# EAGLE board RH016.1 (EAGLE 7.1.0)
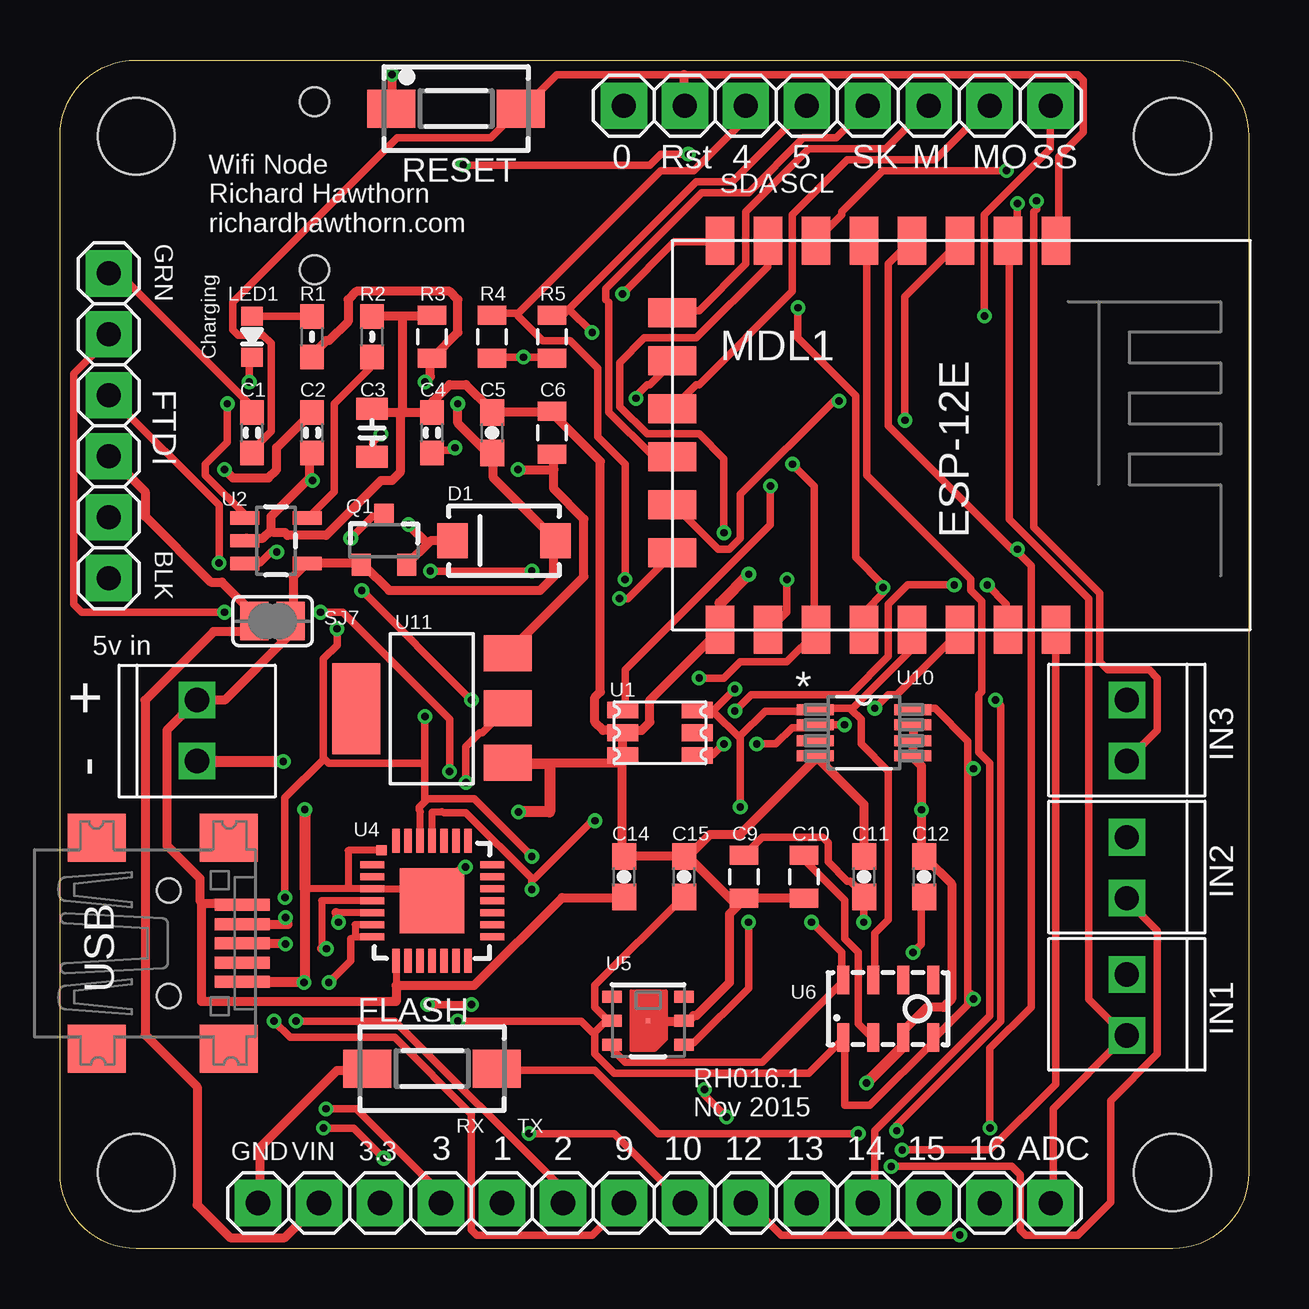
[diagram p0: board, top side]
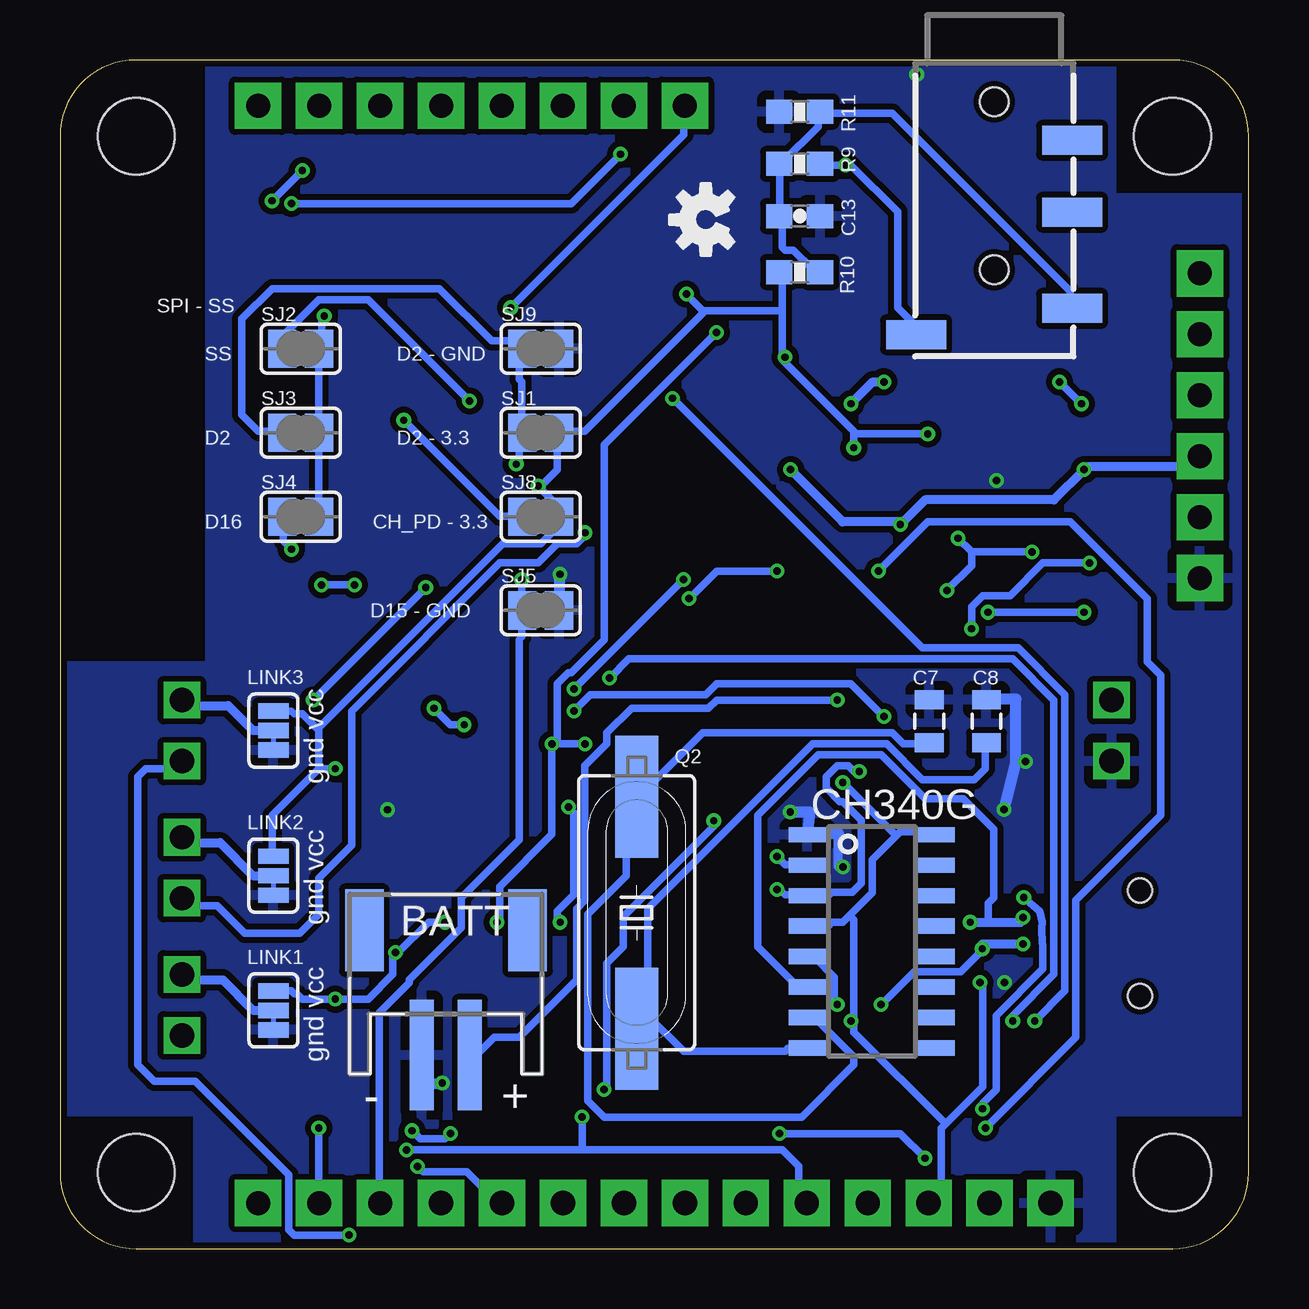
[diagram p1: board, bottom side, seen from below]

Size 49.53 x 49.53 mm. Coordinates in mm from the lower left corner, seen from the top.
Outline: 0,3.17 0,46.35 arc-90 3.17,49.53 46.35,49.53 arc-90 49.53,46.35 49.53,3.17 arc-90 46.35,0 3.17,0 arc-90 0,3.17
Copper layers (1*16): Top 0.035mm / dielectric 1.5mm / Bottom 0.035mm
Design rules "ITEADstudio_DRC *": minimum track width 12mil, minimum drill 12mil, track to track 6mil, track to pad 6mil, pad to pad 6mil, via to via 6mil, smd to smd 0mil, copper to edge 10mil, drill to drill 10mil, minimum pad ring 10mil, minimum via ring 6mil, stop-mask expansion 2mil, vias tented up to drill 100mil, thermal gap 15mil
Net classes: 1 power: width 0.381 mm, clearance 0.254 mm
Holes 3.2 mm at 3.17,3.17 46.35,3.17 3.17,46.35 46.35,46.35
tRestrict: area 43.5,24.5 to 49.5,49.5; area 44,0 to 49.5,5.5; area 0,44 to 5.5,49.5; area 0,0 to 5.5,5.5
bRestrict: area 43.5,24.5 to 49.5,49.5; area 0,0 to 5.5,5.5; area 44,0 to 49.5,5.5; area 0,44 to 5.5,49.5

## Footprints (pad centres in the part's own frame; a part is rotated, then mirrored left to right if it is on the bottom)
0603-CAP = smd 1.016 x 0.965: 1 -0.85,0; 2 0.85,0
0805-CAP = smd 0.902 x 1.3: 1 -1,0; 2 1,0
0603-CAP' = smd 1.1 x 1: 1 -0.85,0; 2 0.85,0
0805 = smd 0.8 x 1.2: 1 -0.9,0; 2 0.9,0
USB-MINIB = smd 0.5 x 2.308: D+ 0,4.064; D- -0.8,4.064; GND 1.6,4.064; ID 0.8,4.064; VBUS -1.6,4.064 | smd 2 x 2.4: GND1 -4.4,-2; GND2 -4.4,3.5; GND3 4.4,3.5; GND4 4.4,-2 | hole 1: -2.2,1; 2.2,1
JST-PH-2-SMT-RA = smd 1 x 4.6: 1 1,-3.7; 2 -1,-3.7 | smd 1.6 x 3.4: NC1 -3.4,1.5; NC2 3.4,1.5
1X06 = drill 1 pad 1.93 square: 1 -6.35,0; 2 -3.81,0; 3 -1.27,0; 4 1.27,0; 5 3.81,0; 6 6.35,0
SMA-DIODE = smd 1.27 x 1.47: A -2.15,0; C 2.15,0
DTSM-3 = smd 2 x 1.6: 1 -2.7,0; 2 2.7,0
1X02_2.54_SCREWTERM = drill 1.016 square: P1 2.54,0; P2 0,0
1X14 = drill 1 pad 1.93 square: 1 -16.51,0; 2 -13.97,0; 3 -11.43,0 | drill 1.016 pad 1.93 square: 4 -8.89,0; 5 -6.35,0; 6 -3.81,0; 7 -1.27,0; 8 1.27,0; 9 3.81,0; 10 6.35,0; 11 8.89,0; 12 11.43,0; 13 13.97,0; 14 16.51,0
1X08 = drill 1 pad 1.93 square: 1 -8.89,0; 2 -6.35,0; 3 -3.81,0; 4 -1.27,0; 5 1.27,0; 6 3.81,0; 7 6.35,0; 8 8.89,0
0603-LED = smd 0.8 x 0.9: MINUS -0.85,0; PLUS 0.85,0
PAD-JUMPER-3-2OF3_NC_BY_TRACE_YES_SILK_FULL_BOX = smd 0.635 x 1.27: 1 -0.813,0; 2 0,0; 3 0.813,0
ESP8266-ESP12E = smd 2 x 1.2: 1 0,16; 2 0,14; 3 0,12; 4 0,10; 5 0,8; 6 0,6; 7 0,4; 8 0,2; 9 16.2,2; 10 16.2,4; 11 16.2,6; 12 16.2,8; 13 16.2,10; 14 16.2,12; 15 16.2,14; 16 16.2,16 | smd 1.2 x 2: 17 11,0; 18 3,0; 19 5,0; 20 13,0; 21 7,0; 22 9,0
SOT23-3 = smd 0.8 x 0.9: 1 -0.95,-1; 2 0.95,-1; 3 0,1.1
SM49 = smd 5.08 x 1.778: 1 -4.826,0; 2 4.826,0
0603-RES = smd 1.016 x 0.965: 1 -0.85,0; 2 0.85,0
0603-RES' = smd 1.1 x 1: 1 -0.85,0; 2 0.85,0
SJ = smd 1.168 x 1.6: 1 -0.762,0; 2 0.762,0
TMB-6 = smd 1.3 x 0.7: 1 -1.55,0.95; 2 -1.55,0; 3 -1.55,-0.95; 4 1.55,-0.95; 5 1.55,0; 6 1.55,0.95
SOT23-5 = smd 0.55 x 1.2: 1 -0.95,-1.3; 2 0,-1.3; 3 0.95,-1.3; 4 0.95,1.3; 5 -0.95,1.3
MLP28 = smd 1 x 0.3: 1 -2.5,1.5; 2 -2.5,1; 3 -2.5,0.5; 4 -2.5,0; 5 -2.5,-0.5; 6 -2.5,-1; 7 -2.5,-1.5; 15 2.5,-1.5; 16 2.5,-1; 17 2.5,-0.5; 18 2.5,0; 19 2.5,0.5; 20 2.5,1; 21 2.5,1.5 | smd 0.3 x 1: 8 -1.5,-2.5; 9 -1,-2.5; 10 -0.5,-2.5; 11 0,-2.5; 12 0.5,-2.5; 13 1,-2.5; 14 1.5,-2.5; 22 1.5,2.5; 23 1,2.5; 24 0.5,2.5; 25 0,2.5; 26 -0.5,2.5; 27 -1,2.5; 28 -1.5,2.5 | smd 2.7 x 2.7: EXP 0,0 | smd 0.435 x 0.435: M -2.103,2.103
HTU21D = smd 0.2 x 0.2: 7 0,0 | smd 0.8 x 0.5: DATA 1.5,-1; GND 1.5,0; NC@1 -1.5,1; NC@6 1.5,1; SCK -1.5,-1; VDD -1.5,0
LGA8 = smd 1.2 x 0.5: 1 -1.2,1.875; 2 -1.2,0.625; 3 -1.2,-0.625; 4 -1.2,-1.875; 5 1.2,-1.875; 6 1.2,-0.625; 7 1.2,0.625; 8 1.2,1.875
SOP65P490X110-8N = smd 1.524 x 0.457: 1 -2.032,0.965; 2 -2.032,0.33; 3 -2.032,-0.33; 4 -2.032,-0.965; 5 2.032,-0.965; 6 2.032,-0.33; 7 2.032,0.33; 8 2.032,0.965
SOT223 = smd 1.499 x 2.007: 1 -2.261,-3.15; 2 0.025,-3.15; 3 2.311,-3.15 | smd 3.81 x 2.007: 4 0,3.15
AUDIO-JACK-TRRS-SMD = smd 1.2 x 2.5: EARTH 11.3,-3.25; RING1 6.2,3.25; RING2 3.2,3.25; TIP 10.2,3.25 | hole 1.2: 1.6,0; 8.6,0
SOIC16 = smd 0.635 x 1.524: 1 -4.445,-2.695; 2 -3.175,-2.695; 3 -1.905,-2.695; 4 -0.635,-2.695; 5 0.635,-2.695; 6 1.905,-2.695; 7 3.175,-2.695; 8 4.445,-2.695; 9 4.445,2.695; 10 3.175,2.695; 11 1.905,2.695; 12 0.635,2.695; 13 -0.635,2.695; 14 -1.905,2.695; 15 -3.175,2.695; 16 -4.445,2.695

## Placement (x,y rotation side)
C1  0.1  [0603-CAP]  8,34 90 top
C2  1u  [0603-CAP]  10.5,34 270 top
C3  10u  [0805-CAP]  13,34 90 top
C4  0.1  [0603-CAP]  15.5,34 90 top
C5  4u7  [0603-CAP']  18,34 90 top
C6  1 uF  [0805]  20.5,34 90 top
C7  22uF  [0805]  13.31,21.98 90 bottom
C8  22uF  [0805]  10.93,21.98 90 bottom
C9  0.1uF  [0805]  28.5,15.5 270 top
C10  0.1uF  [0805]  31,15.5 270 top
C11  0.1uF  [0603-CAP']  33.5,15.5 90 top
C12  0.1uF  [0603-CAP']  36,15.5 90 top
C13  0.1uF  [0603-CAP']  18.71,43.02 0 bottom
C14  1uF  [0603-CAP']  23.5,15.5 90 top
C15  0.1uF  [0603-CAP']  26,15.5 90 top
CN1  USB  [USB-MINIB]  3.53,12.73 270 top
CN3  BATT  [JST-PH-2-SMT-RA]  33.45,11.77 0 bottom
CN4  FTDI  [1X06]  2.03,34.29 90 top
D1  SCHOTTKY  [SMA-DIODE]  18.5,29.5 180 top
FLASH  DTSM-3  [DTSM-3]  15.5,7.5 180 top
IN1  M022.54MM_SCREWTERM  [1X02_2.54_SCREWTERM]  44.45,11.43 270 top
IN2  M022.54MM_SCREWTERM  [1X02_2.54_SCREWTERM]  44.45,17.14 270 top
IN3  M022.54MM_SCREWTERM  [1X02_2.54_SCREWTERM]  44.45,22.86 270 top
IN4  M022.54MM_SCREWTERM  [1X02_2.54_SCREWTERM]  5.71,20.32 90 top
JP3  [1X14]  24.77,1.91 180 top
JP5  [1X08]  32.38,47.62 0 top
LED1  LED0603  [0603-LED]  8,38 90 top
LINK1  JUMPER-PAD-3-2OF3_NC_BY_TRACE  [PAD-JUMPER-3-2OF3_NC_BY_TRACE_YES_SILK_FULL_BOX]  40.64,9.93 270 bottom
LINK2  JUMPER-PAD-3-2OF3_NC_BY_TRACE  [PAD-JUMPER-3-2OF3_NC_BY_TRACE_YES_SILK_FULL_BOX]  40.64,15.54 270 bottom
LINK3  JUMPER-PAD-3-2OF3_NC_BY_TRACE  [PAD-JUMPER-3-2OF3_NC_BY_TRACE_YES_SILK_FULL_BOX]  40.64,21.59 270 bottom
MDL1  [ESP8266-ESP12E]  25.5,42 270 top
Q1  MOSFET  [SOT23-3]  13.5,29.5 0 top
Q2  [SM49]  25.5,14 270 bottom
R1  1k5  [0603-RES]  10.5,38 90 top
R2  2K  [0603-RES]  13,38 270 top
R3  100 K  [0805]  15.5,38 270 top
R4  4.7k  [0805]  18,38 270 top
R5  4.7k  [0805]  20.5,38 270 top
R9  33r  [0603-RES']  18.71,45.2 0 bottom
R10  10K  [0603-RES']  18.71,40.69 180 bottom
R11  10K  [0603-RES']  18.71,47.38 0 bottom
RESET  DTSM-3  [DTSM-3]  16.5,47.5 180 top
SJ1  [SJ]  29.5,34 0 bottom
SJ2  [SJ]  39.5,37.5 0 bottom
SJ3  [SJ]  39.5,34 0 bottom
SJ4  [SJ]  39.5,30.5 0 bottom
SJ5  [SJ]  29.5,26.6 0 bottom
SJ7  [SJ]  8.86,26.15 180 top
SJ8  [SJ]  29.5,30.5 0 bottom
SJ9  [SJ]  29.5,37.5 0 bottom
U1  TSL2561  [TMB-6]  25,21.5 0 top
U2  MCP73831  [SOT23-5]  9,29.5 270 top
U4  CP2102  [MLP28]  15.5,14.5 0 top
U5  HTU21D  [HTU21D]  24.5,9.5 0 top
U6  MPL3115A2LGA8  [LGA8]  34.5,10 90 top
U10  MCP9808  [SOP65P490X110-8N]  33.5,21.5 0 top
U11  REG1117  [SOT223]  15.5,22.5 90 top
U$2  AUDIO-JACK3  [AUDIO-JACK-TRRS-SMD]  10.61,49.38 270 bottom
U$3  [OSHW-LOGO-S]  22.63,42.88 90 bottom
U$4  CH340G  [SOIC16]  15.7,12.81 270 bottom

## Library data of the parts
C1-C4 CN1 LED1 R1 R2 = LowPowerLab
C5 C7-C15 R4 R5 R9-R11 U2 U4 = SparkFun
C6 = SparkFun-Capacitors
CN3 = adafruit
CN4 JP3 JP5 = pinhead
D1 Q1 = SparkFun-DiscreteSemi
FLASH RESET = switch-tact
IN1-IN4 U$2 = SparkFun-Connectors
LINK1-LINK3 = SparkFun-Passives
MDL1 = ESP8266-ESP12E
Q2 = crystal; OC_FARNELL: unknown; OC_NEWARK: unknown
R3 = SparkFun-Resistors
SJ1-SJ5 SJ7-SJ9 = jumper
U1 = template
U5 U6 = SparkFun-Sensors
U10 = Richard1; MPN: MCP9808-E/MS; OC_FARNELL: 2080523; OC_NEWARK: 89T8871; PACKAGE: MSOP-8; SUPPLIER: MICROCHIP
U11 = burr-brown; MPN: REG1117; OC_FARNELL: 1097566; OC_NEWARK: 14P6981
U$3 = SparkFun-Aesthetics
U$4 = usb-serial

## Nets
3.3V: C3.1 C4.1 C9.1 C11.1 C12.1 C15.1 JP3.12 LINK1.1 LINK2.1 LINK3.1 MDL1.8 R4.2 R5.2 R10.2 SJ1.2 SJ8.2 U1.1 U4.6 U4.7 U5.VDD U6.1 U6.4 U10.8 U11.2 U$4.4 U$4.16
ADC: IN1.P1 JP3.1 MDL1.2 R9.2 U$2.EARTH
CH_PD: MDL1.3 SJ8.1
CP_CTS: U4.23
CP_DCD: U4.1
CP_DSR: U4.27
CP_DTR: U4.28
CP_RI: U4.2
CP_RST: U4.9
CP_RTS: U4.24
CP_SUSP1: U4.12
CP_SUSP2: U4.11
CS: JP5.8 SJ2.2 SJ3.2 SJ4.2
CSO: MDL1.17 SJ2.1
D0: FLASH.1 JP5.1 MDL1.12
D1_TX: CN4.5 JP3.10 MDL1.16 U4.25 U$4.3
D2: JP3.9 MDL1.11 SJ1.1 SJ3.1 SJ9.1
D3_RX: CN4.4 JP3.11 MDL1.15 U4.26 U$4.2
D4_SDA: JP5.3 MDL1.13 R4.1 U1.6 U5.DATA U6.7 U10.1
D5_SCL: JP5.4 MDL1.14 R5.1 U1.4 U5.SCK U6.8 U10.2
D9: JP3.8 MDL1.19
D10: JP3.7 MDL1.20
D12: IN3.P1 JP3.6 MDL1.6
D13: IN2.P1 JP3.5 MDL1.7
D14: JP3.4 MDL1.5
D15: JP3.3 MDL1.10 SJ5.1
D16: JP3.2 MDL1.4 SJ4.1
D+: CN1.D+ U4.4 U$4.5
D-: CN1.D- U4.5 U$4.6
GND [power]: C2.2 C3.2 C4.2 C5.2 C6.2 C7.2 C8.2 C9.2 C10.2 C11.2 C12.2 C13.2 C14.2 C15.2 CN1.GND CN3.2 CN4.1 FLASH.2 IN4.P2 JP3.14 LINK1.3 LINK2.3 LINK3.3 MDL1.9 R2.1 R3.1 R11.1 RESET.2 SJ5.2 SJ9.2 U1.2 U1.3 U2.2 U4.3 U4.EXP U4.M U5.7 U5.GND U6.3 U10.4 U10.5 U10.6 U10.7 U11.1 U$4.1
INT1: U6.6
INT2: U6.5
MISO: JP5.6 MDL1.18
MOSI: JP5.7 MDL1.21
N$1: C7.1 Q2.1 U$4.7
N$2: C8.1 Q2.2 U$4.8
N$4: LED1.PLUS R1.2
N$9: C10.1 U6.2
N$13 [power]: IN1.P2 LINK1.2
N$14: C13.1 R9.1 R10.1 R11.2 U$2.TIP
N$15 [power]: IN2.P2 LINK2.2
N$19 [power]: IN3.P2 LINK3.2
N$20: C1.2 CN4.6
PROG: R2.2 U2.5
PWR [power]: C2.1 C6.1 CN4.3 D1.C JP3.13 Q1.2 SJ7.2 U11.3
RST: C1.1 JP5.2 MDL1.1 RESET.1
SCLK: JP5.5 MDL1.22
STAT: LED1.MINUS U2.1
VBAT: CN3.1 Q1.3 U2.3
VBUS [power]: C5.1 C14.1 CN1.VBUS D1.A IN4.P1 Q1.1 R1.1 R3.2 SJ7.1 U2.4 U4.8

## Tracks (layer width: path | path; a pad name or v marks a point on that pad's centre or on a via)
3.3V  (via drill 0.3)
  Top 0.3: U4.6 12.3,13.5 12.3,13 U4.7
  Top 0.305: v29.6,31.77 29.6,30.18 23.55,24.12 23.55,22.52 U1.1 | R4.2 18.06,37.15 v19.32,37.15 20.46,37.15 R5.2 | v16.46,33.38 16.34,33.26 15.54,33.26 C4.1 | v13.37,33.95 13.03,33.6 13.03,33.03 C3.1 | v23.43,39.78 25.6,41.95 27.43,41.95 MDL1.8 | v11.2,11.09 12.12,12 12.12,12.92 12.3,13 | v16.92,19.43 16.92,20.92 17.49,21.49 17.6,21.49 18.63,22.52 U11.2 | C9.1 28.57,16.46 29.26,17.14 31.77,17.14 32,16.92 32,16.12 32.8,15.32 32.92,15.32 33.49,14.74 C11.1 33.49,14.52 v33.49,13.6 | v35.55,12.34 35.89,12.69 35.89,14.63 C12.1 | C15.1 25.95,14.63 22.29,10.97 22.29,10.06 22.75,9.6 22.97,9.6 U5.VDD 22.75,9.49 22.29,9.03 | 37.83,10.63 37.83,10.17 36.46,8.8 U6.4 36.46,8.69 33.75,5.97 32.7,5.97 32.69,8.69 U6.1 32.58,8.69 31.2,7.32 23.09,7.32 22.29,8.12 22.29,9.03 | 37.83,10.63 37.83,20 | 37.83,20 37.83,21.14 36.46,22.52 35.55,22.52 U10.8 | v38.06,20 37.83,20 | v38.06,10.4 38.06,10.52 37.95,10.63 37.83,10.63 | v16.57,9.49 21.72,9.49 22.17,9.03 22.29,9.03
  Bottom 0.305: 16.46,33.95 16.46,34.06 19.43,37.03 19.43,37.15 | 16.46,33.95 v16.46,33.38 | 19.43,39.09 19.43,40.58 19.55,40.69 R10.2 | 19.43,39.09 19.43,37.15 | 16.46,33.95 v13.37,33.95 | 22.75,39.09 v23.43,39.78 | 19.43,39.09 22.75,39.09 | v19.32,37.15 19.43,37.15 | 22.75,39.09 22.75,38.98 27.66,34.06 28.69,34.06 SJ1.2 28.8,33.95 28.8,32.46 29.49,31.77 v29.6,31.77 28.8,30.98 28.8,30.52 SJ8.2 28.8,30.4 28.8,30.06 29.49,29.38 31.09,29.38 38.75,21.72 38.75,21.6 | v11.2,11.09 11.09,10.97 11.09,6.74 12.63,5.2 | 12.63,5.2 12.8,5.03 12.8,2.4 13.26,1.94 JP3.12 | 14.69,17.2 15.69,16.2 15.69,14.83 16.63,13.89 | 14.69,17.2 14.52,17.37 13.95,17.37 13.83,17.26 13.03,17.26 U$4.16 | 16.63,13.89 16.92,13.6 17.37,13.6 17.49,13.49 18.29,13.49 U$4.4 | 14.69,17.2 v16.92,19.43 | 12.63,5.2 16.46,9.03 16.46,9.49 | 16.46,9.49 16.46,13.72 16.63,13.89 | LINK1.1 40.58,10.74 39.89,10.74 39.78,10.63 39.66,10.63 39.43,10.4 v38.06,10.4 36.69,10.4 35.66,11.43 35.66,12.23 v35.55,12.34 35.43,12.34 34.18,13.6 v33.49,13.6 | 38.75,20 40.69,18.06 40.69,16.46 LINK2.1 | 38.75,21.6 38.75,20 | 38.75,21.6 39.43,22.29 39.78,22.29 39.89,22.4 LINK3.1 | v38.06,20 38.75,20 | v16.57,9.49 16.46,9.49
ADC  (via drill 0.3)
  Top 0.305: JP3.1 41.38,1.94 41.38,5.83 44.35,8.8 IN1.P1 44.35,8.91 42.86,10.4 42.86,27.09 39.55,30.4 39.55,41.95 MDL1.2 39.55,42.06 39.89,42.41 v39.89,43.55 | v16.8,45.15 24.57,45.15 25.03,45.61 v26.18,45.61
  Bottom 0.305: R9.2 17.83,45.15 v16.8,45.15 16.57,45.15 14.63,43.2 14.63,39.2 13.95,38.52 13.95,38.18 U$2.EARTH | v26.18,45.61 28.23,43.55 v39.89,43.55
CH_PD  (via drill 0.3)
  Top 0.305: v35.2,34.52 35.2,39.66 37.49,41.95 MDL1.3
  Bottom 0.305: v35.2,34.52 31.2,30.52 30.29,30.52 SJ8.1
CS  (via drill 0.3)
  Top 0.305: v38.52,38.86 38.52,43.09 41.26,45.83 41.26,47.55 JP5.8
  Bottom 0.305: SJ4.2 38.75,30.52 38.75,33.95 SJ3.2 38.75,34.06 SJ2.2 38.63,37.6 38.63,38.75 v38.52,38.86
CSO  (via drill 0.3)
  Top 0.305: v32.46,35.32 32.23,35.32 28.35,31.43 28.35,29.6 27.89,29.15 27.43,29.15 25.6,30.98 MDL1.17
  Bottom 0.305: v32.46,35.32 36.69,39.55 38.75,39.55 40.23,38.06 40.23,37.6 SJ2.1
D0  (via drill 0.3)
  Top 0.305: v33.26,4.8 24.92,4.8 22.29,7.43 18.29,7.43 FLASH.1 | v34.86,4.92 34.86,5.14 39.2,9.49 39.2,22.63 v38.98,22.86 | MDL1.12 33.6,25.83 33.6,26.63 34.29,27.32 v34.29,27.55 34.29,27.66 33.15,28.8 33.15,35.55 30.75,37.95 v30.75,39.2
  Bottom 0.305: v33.26,4.8 33.49,4.57 34.52,4.57 v34.86,4.92 | v34.29,27.55 v38.98,22.86 | v30.75,39.2 23.55,46.41 23.55,47.55 JP5.1
D1_TX  (via drill 0.3)
  Top 0.3: U4.25 15.5,18.2 15.9,18.2
  Top 0.305: 19.66,15.43 16.92,18.17 16,18.17 15.9,18.2 | v19.66,14.97 19.66,15.43 | v35.09,4.12 38.75,4.12 41.49,6.86 41.49,25.72 MDL1.16 | v22.29,17.83 22.17,17.83 19.77,15.43 19.66,15.43 | v26.86,6.63 26.86,6.4 v27.77,5.49 | v6.86,26.52 0.91,26.52 0.57,26.86 0.57,36.46 1.94,37.83 1.94,38.06 CN4.5 | v10.86,26.52 11.77,26.52 16.23,22.06 v16.23,19.89
  Bottom 0.305: v19.66,14.97 19.55,14.86 19.43,14.86 19.32,14.74 18.4,14.74 U$4.3 18.29,14.74 17.49,14.74 17.37,14.86 16.52,14.86 16.14,15.23 16.14,17.86 16.92,18.63 17.03,18.63 17.6,19.2 17.6,19.66 17.14,20.12 16.69,20.12 16.46,19.89 v16.23,19.89 | 27.77,4.12 19.43,4.12 18.75,3.43 18.75,2.17 18.52,1.94 JP3.10 | 27.77,4.12 v35.09,4.12 | v22.29,17.83 22.29,17.6 26.06,13.83 26.06,12.57 26.75,11.89 26.75,6.74 v26.86,6.63 | 27.77,4.12 v27.77,5.49 | v10.86,26.52 v6.86,26.52
D2  (via drill 0.3)
  Top 0.305: v30.52,32.69 31.43,31.77 31.43,25.83 MDL1.11 31.55,25.72 30.29,24.46 28.35,24.46 27.66,23.77 v26.63,23.77 | v9.83,9.49 13.95,9.49 20.92,2.52 20.92,1.94 JP3.9
  Bottom 0.305: SJ3.1 40.35,34.06 41.26,34.06 41.95,34.75 41.95,38.75 40.69,40.01 33.72,40.01 31.55,37.83 30.75,37.83 30.4,37.49 SJ9.1 30.29,37.49 30.4,37.38 30.4,36.23 30.29,36.12 30.29,34.06 SJ1.1 30.4,33.95 30.4,32.8 v30.52,32.69 | v9.83,9.49 9.83,9.72 8.12,11.43 8.12,22.86 9.83,24.57 25.83,24.57 v26.63,23.77
D3_RX  (via drill 0.3)
  Top 0.3: U4.26 15,18.2
  Top 0.305: 15.26,18.69 15.32,18.75 17.26,18.75 v19.66,16.34 | 15.26,18.69 14.97,18.4 14.97,18.29 15,18.2 | v38.63,27.66 39.43,26.86 39.43,25.83 MDL1.15 | v37.26,27.66 35.32,27.66 34.52,26.86 34.52,24.69 32.92,23.09 28.8,23.09 v28.12,22.4 | 15.2,20.23 15.2,18.75 15.26,18.69 | 15.2,20.23 v15.2,22.17 | v6.63,28.57 6.63,30.98 2.06,35.55 CN4.4 | v11.54,25.83 11.54,25.15 10.97,24.57 10.97,20.46 11.2,20.23 | 15.2,20.23 11.2,20.23 | v11.09,5.83 12.34,5.83 15.77,2.4 15.77,1.94 JP3.11 | v9.37,14.63 9.37,18.79 11,20.42 11.2,20.23
  Bottom 0.305: v19.66,16.34 19.32,16 18.4,16 U$4.2 | v37.26,27.66 v38.63,27.66 | v28.12,22.4 27.43,23.09 22.63,23.09 22.17,23.55 16.57,23.55 v15.2,22.17 | v6.63,28.57 8.57,28.57 9.94,27.2 11.09,27.2 11.54,26.75 v11.54,25.83 | v11.09,5.83 11.09,6.06 10.52,6.63 10.52,9.72 8.57,11.66 8.57,12.57 8.6,12.8 8.6,12.92 8.63,13.14 8.63,13.37 8.6,13.6 8.7,14.06 v9.37,14.63
D4_SDA  (via drill 0.3)
  Top 0.305: 19.09,38.98 18.06,38.98 R4.1 | 19.09,38.98 25.03,44.92 26.4,44.92 28.57,47.09 JP5.3 | v28.69,13.6 28.69,10.86 26.4,8.57 26.06,8.57 U5.DATA | 28.35,21.26 v28.35,18.4 | 27.2,22.4 28.35,21.26 | 27.2,22.4 26.63,22.4 U1.6 | 32.98,22.46 32.92,22.52 31.55,22.52 U10.1 31.43,22.4 29.38,22.4 28.35,21.37 28.35,21.26 | 32.98,22.46 33.38,22.06 33.38,21.03 34.52,19.89 34.52,13.72 33.95,13.14 33.95,11.2 U6.7 | 32.98,22.46 35.43,24.92 35.43,25.72 MDL1.13 | v23.55,27.89 23.55,32.69 22.4,33.83 22.4,36.69 21.26,37.83 20.12,37.83 19.09,38.86 19.09,38.98 | 27.2,22.4 v28.12,23.32
  Bottom 0.305: v28.69,13.6 28.8,13.72 28.8,14.06 28.12,14.74 28.12,18.17 v28.35,18.4 | v28.12,23.32 v23.55,27.89
D5_SCL  (via drill 0.3)
  Top 0.305: 21.2,39.15 26.52,44.46 28,44.46 31.09,47.55 JP5.4 | 21.2,39.15 21.03,38.98 20.57,38.98 R5.1 | U5.SCK 23.09,8.46 23.09,8.23 23.55,7.77 29.26,7.77 32.58,11.09 U6.8 32.58,11.32 32.58,12.34 v31.32,13.6 | v27.66,21.03 27.2,20.57 26.63,20.57 U1.4 | v29.03,21.03 29.83,21.03 30.52,21.72 31.43,21.72 U10.2 31.55,21.83 v32.69,21.83 | v33.95,22.52 34.52,23.09 34.86,23.09 37.49,25.72 MDL1.14 | v22.17,38.18 21.2,39.15
  Bottom 0.305: v29.03,21.03 v27.66,21.03 | v33.95,22.52 33.26,21.83 v32.69,21.83 | v31.32,13.6 31.2,13.72 31.2,15.09 29.03,17.26 v29.03,21.03 | v22.17,38.18 26.86,33.49 26.86,25.38 28.23,24 28.35,24 28.8,23.55 28.8,21.14 v29.03,21.03
D9  (via drill 0.3)
  Top 0.305: v24,35.43 24,35.55 24.46,36.01 24.57,36.01 25.49,36.92 MDL1.19 | v8.91,9.49 9.6,8.8 13.95,8.8 17.14,5.6 17.14,0.8 17.37,0.57 22.17,0.57 23.43,1.83 JP3.8
  Bottom 0.305: v24,35.43 13.6,25.03 9.6,25.03 7.66,23.09 7.66,10.74 v8.91,9.49
D10  (via drill 0.3)
  Top 0.305: v23.32,27.09 23.66,27.09 25.49,28.92 MDL1.20 | v15.43,28.23 v19.66,28.23 | v10.97,5.03 12.23,5.03 v13.49,3.77 | v19.55,4.8 23.09,4.8 25.95,1.94 JP3.7
  Bottom 0.305: v23.32,27.09 22.17,28.23 v19.66,28.23 | v15.43,28.23 13.37,30.29 7.43,30.29 4.23,27.09 4.23,24.46 3.66,23.89 3.66,18.06 7.2,14.52 7.2,8.8 v10.97,5.03 | v13.49,3.77 14.52,4.8 v19.55,4.8
D12  (via drill 0.3)
  Top 0.305: v39.43,44.92 34.29,44.92 32.58,43.2 32.58,43.09 31.55,42.06 MDL1.6 | v40.69,43.66 40.69,43.32 40.58,43.2 40.58,30.06 43.32,27.32 43.32,24.46 43.66,24.12 45.38,24.12 45.72,23.77 45.72,21.6 44.46,20.34 IN3.P1 | v37.49,0.57 30.06,0.57 28.8,1.83 28.57,1.83 JP3.6
  Bottom 0.305: v40.69,43.66 v39.43,44.92 | v37.49,0.57 39.78,0.57 40.01,0.8 40.01,3.09 43.89,6.97 45.61,6.97 46.29,7.66 46.29,19.66 45.95,20 44.69,20 44.46,20.23 IN3.P1
D13  (via drill 0.3)
  Top 0.305: v27.66,29.83 27.66,32.92 26.63,33.95 24.46,33.95 23.32,35.09 23.32,36.92 24.35,37.95 26.52,37.95 29.49,40.92 29.49,41.95 MDL1.7 | v34.63,3.43 39.66,3.43 40.01,3.09 40.01,0.8 40.23,0.57 42.41,0.57 43.78,1.94 43.78,6.17 45.72,8.12 45.72,13.26 44.46,14.52 IN2.P1
  Bottom 0.305: v27.66,29.83 27.77,29.72 27.77,29.6 28,29.38 28.8,29.38 29.6,28.57 31.2,28.57 37.38,22.4 37.38,16.8 38.75,15.43 38.75,13.95 39.55,13.14 41.83,13.14 42.98,14.29 44.12,14.29 44.35,14.52 IN2.P1 | v34.63,3.43 34.4,3.2 32.58,3.2 32,2.63 31.89,2.63 31.2,1.94 JP3.5
D14
  Top 0.305: MDL1.5 33.6,41.95 33.6,32.23 37.95,27.89 37.95,27.43 38.41,26.98 38.41,23.2 38.29,23.09 38.29,20.69 38.75,20.23 38.75,9.72 33.95,4.92 33.95,2.17 33.72,1.94 JP3.4
D15  (via drill 0.3)
  Top 0.305: v30.29,27.89 30.29,26.52 29.6,25.83 MDL1.10
  Bottom 0.305: v30.29,27.89 30.29,26.63 SJ5.1 30.29,26.52 30.29,25.49 30.4,25.38 30.4,17.03 32.8,14.63 32.8,13.37 34.98,11.2 34.98,11.09 36.23,9.83 36.23,1.94 JP3.3
D16  (via drill 0.3)
  Top 0.305: MDL1.4 35.43,41.95 34.52,41.03 34.52,34.29 39.66,29.15 v39.89,29.15 39.89,29.03 40.46,28.46 40.46,10.06 38.75,8.34 v38.75,5.03
  Bottom 0.305: v39.89,29.15 40.23,29.49 40.23,30.4 SJ4.1 | v38.75,5.03 38.75,1.94 JP3.2
D+  (via drill 0.3, 0.31)
  Top 0.3: U4.4 10.9,14.5 10.9,12.5
  Top 0.305: v15.32,10.17 v17.14,10.17
  Top 0.381: 10.9,12.5 v11.1,12.5 | v9.4,12.7 7.59,12.7 CN1.D+
  Bottom 0.305: v17.14,10.17 17.26,10.29 17.26,11.32 18.06,12.12 18.29,12.12 U$4.5 | v15.32,10.17 13.95,11.54 12,11.54 11.17,12.37 v11.1,12.5
  Bottom 0.381: v11.1,12.5 11.1,12.7 v9.4,12.7
D-  (via drill 0.31)
  Top 0.3: U4.5 11.5,14
  Top 0.381: 11.5,14 v11.6,13.6 | v9.4,13.8 9.5,13.5 7.59,13.5 CN1.D-
  Bottom 0.305: 10.86,13.6 10.86,14.4 10.63,14.63 10.63,17.49 11.89,18.75 13.49,18.75 15.32,20.57 17.95,20.57 20.46,18.06 20.46,12.57 18.86,10.97 18.4,10.97 U$4.6
  Bottom 0.381: v11.6,13.6 10.86,13.6 9.5,13.6 v9.4,13.8
GND  (via drill 0.3, 0.31)
  Top 0.3: 12,15 U4.3 15.5,15 U4.EXP | 12,15 10.2,15 | U4.M 12,16.6 12,15
  Top 0.381: 7.59,11.1 CN1.GND | 10.4,32.12 10.4,33.15 C2.2 | 10.4,32.12 8.8,30.52 8.8,29.95 | 8.8,29.95 8.46,29.6 7.77,29.6 U2.2 | 14.29,38.86 15.43,38.86 R3.1 | 14.29,38.86 13.03,38.86 R2.1 | 14.17,34.86 13.14,34.86 13.03,34.98 C3.2 | 14.17,34.86 14.29,34.86 | 14.29,34.86 15.43,34.86 C4.2 15.54,34.98 15.54,35.32 16.23,36.01 16.92,36.01 17.95,34.98 C5.2 18.06,34.86 20.46,34.86 C6.2 20.57,34.75 22.52,32.8 22.52,23.2 22.29,22.97 22.29,21.95 22.63,21.6 23.32,21.6 U1.2 | 14.29,34.86 14.29,38.86 | 14.17,34.86 14.17,32.35 13.83,32 13.37,32 11.09,29.72 9.49,29.72 9.37,29.83 8.91,29.83 8.8,29.95 | U5.7 24.57,9.49 25.95,9.49 U5.GND 26.18,9.49 26.4,9.72 26.52,9.72 27.89,11.09 27.89,13.95 28.46,14.52 C9.2 | C10.2 30.98,14.63 28.69,14.63 C9.2 | C11.2 33.49,16.46 33.49,18.52 31.55,20.46 U10.4 31.43,20.34 28.35,17.26 27.09,17.26 26.18,16.34 C15.2 | U1.3 23.43,20.57 23.43,21.49 U1.2 | C15.2 25.95,16.34 23.55,16.34 C14.2 23.43,16.46 23.43,20.46 U1.3 | MDL1.9 27.43,25.72 24.57,22.86 24.57,21.95 24.23,21.6 23.55,21.6 U1.2 | U11.1 18.75,20.23 23.32,20.23 U1.3 | C9.2 28.12,14.4 26.29,16.23 C15.2 | U10.7 35.55,21.72 35.55,21.26 U10.6 35.55,21.03 35.55,20.69 U10.5 35.55,20.46 35.89,20.12 v35.89,18.29 35.89,16.46 C12.2 36.12,16.23 37.15,15.2 37.15,10.4 36.8,10.06 36.12,10.06 35.2,9.14 35.2,8.8 U6.3 | FLASH.2 12.69,7.43 11.54,7.43 8.34,4.23 8.34,1.94 JP3.14 | v13.83,48.92 13.83,47.55 RESET.2 | v10.17,11.09 v10.17,11.1 | v10.52,32 10.4,32.12
  Top 0.406: 10.2,15 10.2,11.1 v10.17,11.1 7.59,11.1
  Top 0.46: IN4.P2 9.3,20.32 v9.3,20.3 | v28.7,28.1 27.5,26.9 MDL1.9 | U11.1 20.4,20.2 20.4,18.2 v19.1,18.2 | v10.2,18.3 10.2,15 | 15.5,15 v16.9,15.9 | U6.3 35.1,8.4 v33.6,6.9
  Bottom 0.381: v16.9,15.9 17.1,15.9 17.1,17.3
  Bottom 0.46: v9.3,20.3 9.7,20.3 | 9.7,20.3 9.7,22.9 10.93,22.9 C8.2 | SJ5.2 28.7,26.6 v28.7,28.1 | v19.1,18.2 18.3,18.2 U$4.1 17.1,17.3 | 9.7,20.3 v10.2,18.3 | v33.6,6.9 34.5,6.8 CN3.2
  pour Bottom: 0,49.5 49.5,49.5 49.5,0 0,0
MISO
  Top 0.305: JP5.6 34.4,45.83 31.2,45.83 28.57,43.2 28.57,41.03 26.63,39.09 25.6,39.09 MDL1.18
MOSI
  Top 0.305: MDL1.21 25.6,35.09 26.52,36.01 26.63,36.01 30.52,39.89 30.52,43.09 32.8,45.38 36.46,45.38 38.63,47.55 JP5.7
N$1
  Bottom 0.305: C7.1 13.37,21.03 14.4,21.03 14.86,21.49 22.75,21.49 25.49,18.75 Q2.1 25.49,18.63 25.95,18.17 25.95,15.54 27.55,13.95 27.55,6.17 26.86,5.49 18.63,5.49 16.46,7.66 16.46,8 18.06,9.6 18.29,9.6 U$4.7
N$2
  Bottom 0.305: 25.03,9.72 25.03,14.17 18.17,21.03 15.09,21.03 13.6,19.55 11.43,19.55 10.97,20 10.97,21.03 C8.1 | 25.03,9.72 25.49,9.26 Q2.2 25.03,9.72 | 25.03,9.72 23.55,8.23 19.32,8.23 19.2,8.34 18.4,8.34 U$4.8
N$4
  Top 0.305: LED1.PLUS 8,38.86 10.4,38.86 R1.2
N$9
  Top 0.305: C10.1 31.09,16.34 31.09,16.12 32.69,14.52 32.69,12.92 33.26,12.34 33.26,9.37 33.83,8.8 U6.2
N$13
  Bottom 0.381: LINK1.2 40.69,9.94 41.49,9.94 42.75,11.2 44.12,11.2 44.35,11.43 IN1.P2
N$14
  Bottom 0.305: R10.1 17.95,40.8 18.17,40.8 18.97,41.6 19.32,41.6 19.43,41.72 19.43,42.86 19.55,42.98 C13.1 19.55,43.09 19.55,45.15 R9.1 19.43,45.26 17.95,46.75 17.95,47.32 R11.2 17.72,47.32 14.86,47.32 7.43,39.89 7.43,39.2 U$2.TIP
N$15
  Bottom 0.381: LINK2.2 40.69,15.54 41.49,15.54 42.86,16.92 44.12,16.92 44.35,17.14 IN2.P2
N$19
  Bottom 0.381: LINK3.2 40.69,21.6 41.49,21.6 42.52,22.63 44.12,22.63 44.35,22.86 IN3.P2
N$20
  Top 0.305: C1.2 7.89,34.86 7.89,35.2 2.52,40.58 2.06,40.58 CN4.6
PROG
  Top 0.305: R2.2 12.92,37.15 12.92,36.69 11.43,35.2 11.43,31.55 10.4,30.52 U2.5
PWR  (via drill 0.3)
  Top 0.381: 20.57,32.46 20.57,31.66 21.83,30.4 21.83,28 18.75,24.92 U11.3 | 20.57,32.46 20.57,33.03 C6.1 | 15.32,29.38 15.43,29.49 D1.C | 15.32,29.38 14.52,28.57 Q1.2 | v6.86,32.46 7.2,32.12 8.69,32.12 9.03,32.46 9.03,33.38 10.4,34.75 C2.1 | CN4.3 2.06,33.03 3.54,31.55 3.54,30.52 6.29,27.77 6.74,27.77 8,26.52 8,26.18 SJ7.2 7.89,26.06 7.54,25.72 6.4,25.72 3.54,22.86 3.54,8.91 5.71,6.74 5.71,1.83 7.09,0.46 9.37,0.46 10.74,1.83 JP3.13 | v14.52,30.18 15.32,29.38 | v19.09,32.46 20.57,32.46
  Bottom 0.381: CN4.3 2.06,32.92 2.4,32.58 6.74,32.58 v6.86,32.46 8.12,31.2 13.49,31.2 v14.52,30.18 14.63,30.29 16.92,30.29 v19.09,32.46
RST
  Top 0.305: C1.1 8,33.26 8.8,34.06 8.8,37.72 8.46,38.06 7.43,38.06 7.2,38.29 7.2,39.43 14.06,46.29 17.95,46.29 19.09,47.43 RESET.1 19.32,47.55 20.69,48.92 26,48.92 42.41,48.92 42.63,48.69 42.63,46.52 41.6,45.49 41.6,42.06 MDL1.1
  Top 0.381: JP5.2 26,48.92
SCLK
  Top 0.305: MDL1.22 25.49,33.03 24.69,33.03 22.86,34.86 22.86,39.43 22.75,39.55 22.75,40.01 26.75,44.01 28.69,44.01 30.98,46.29 32.35,46.29 33.6,47.55 JP5.5
STAT  (via drill 0.3)
  Top 0.305: v7.89,36.12 7.89,37.15 LED1.MINUS | v6.97,35.2 6.97,33.6 6.06,32.69 6.06,32.23 7.77,30.52 U2.1
  Bottom 0.305: v6.97,35.2 v7.89,36.12
VBAT  (via drill 0.3)
  Top 0.305: v12.12,29.6 13.03,30.52 13.49,30.52 Q1.3 | v9.03,29.03 8.8,29.03 8.34,28.57 7.77,28.57 U2.3 | v17.14,22.86 v12.57,27.43
  Bottom 0.305: 11.54,29.03 v12.12,29.6 | v9.03,29.03 11.54,29.03 | 11.54,29.03 11.54,28.46 v12.57,27.43 | v17.14,22.86 22.17,22.86 22.52,22.52 25.72,22.52 26.75,21.49 26.75,21.03 27.66,20.12 27.66,14.52 28,14.17 28,11.2 30.4,8.8 31.43,8.8 32.12,8.12 32.35,8.12 CN3.1
VBUS  (via drill 0.3)
  Top 0.3: U4.8 14,10.97
  Top 0.381: 5.9,14.4 5.9,10.3 14,10.3 14,10.97 17.26,10.97 20.92,14.63 23.43,14.63 C14.1 | 5.9,14.4 7.59,14.4 CN1.VBUS | R1.1 10.52,37.26 11.09,37.83 11.2,37.83 12,38.63 12,39.55 12.34,39.89 16.23,39.89 16.57,39.55 16.57,38.18 15.54,37.15 R3.2 15.43,36.92 15.43,36.35 v15.2,36.12 | v16.57,35.2 16.57,34.4 17.83,33.15 C5.1 18.06,33.15 18.06,32.12 20.57,29.6 D1.A 20.57,29.38 20.57,28 20,27.43 13.72,27.43 12.69,28.46 Q1.1 12.46,28.57 10.4,28.57 U2.4 10.17,28.46 9.72,28 9.72,26.18 SJ7.1 9.6,25.95 9.6,25.6 6.86,22.86 IN4.P1 4.46,21.6 4.46,16.8 5.83,15.43 5.83,14.52 5.9,14.4
  Bottom 0.381: v15.2,36.12 15.66,36.12 v16.57,35.2

## Text on the board
tNames: 0 | Rst | 4 | 5 | SK | MI | MO | SS | SDA | SCL | GRN | Wifi Node / Richard Hawthorn / richardhawthorn.com | Charging | FTDI | BLK | 5v in | + | - | IN3 | IN2 | IN1 | RH016.1 / Nov 2015 | RX | TX | GND | VIN | 3.3 | 3 | 1 | 2 | 9 | 10 | 12 | 13 | 14 | 15 | 16 | ADC
bNames: SPI - SS | D2 - GND | SS | D2 - 3.3 | D2 | CH_PD - 3.3 | D16 | D15 - GND | gnd vcc | gnd vcc | gnd vcc
tDocu: REG